# Altium PCB RTL8153B_DemoPCB.pcbdoc
Units mm, origin at the board's own origin, x right, y up, seen from the top; angles counter-clockwise.
Board outline 69.69 x 82.25 mm, 2 copper layers (Top Layer, Bottom Layer); 19 components, 44 nets, 104 pads, 53 vias.
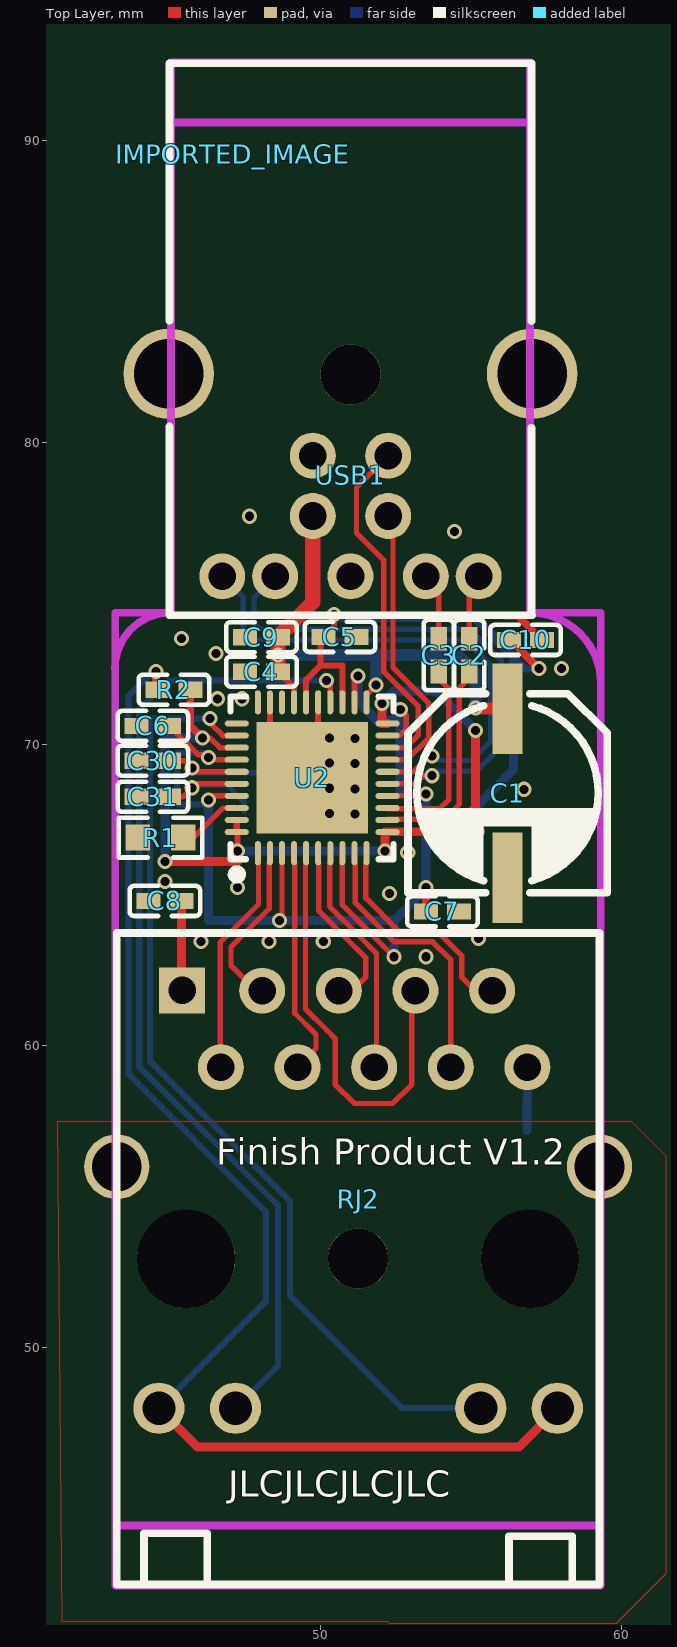
[diagram p0: Top Layer view]
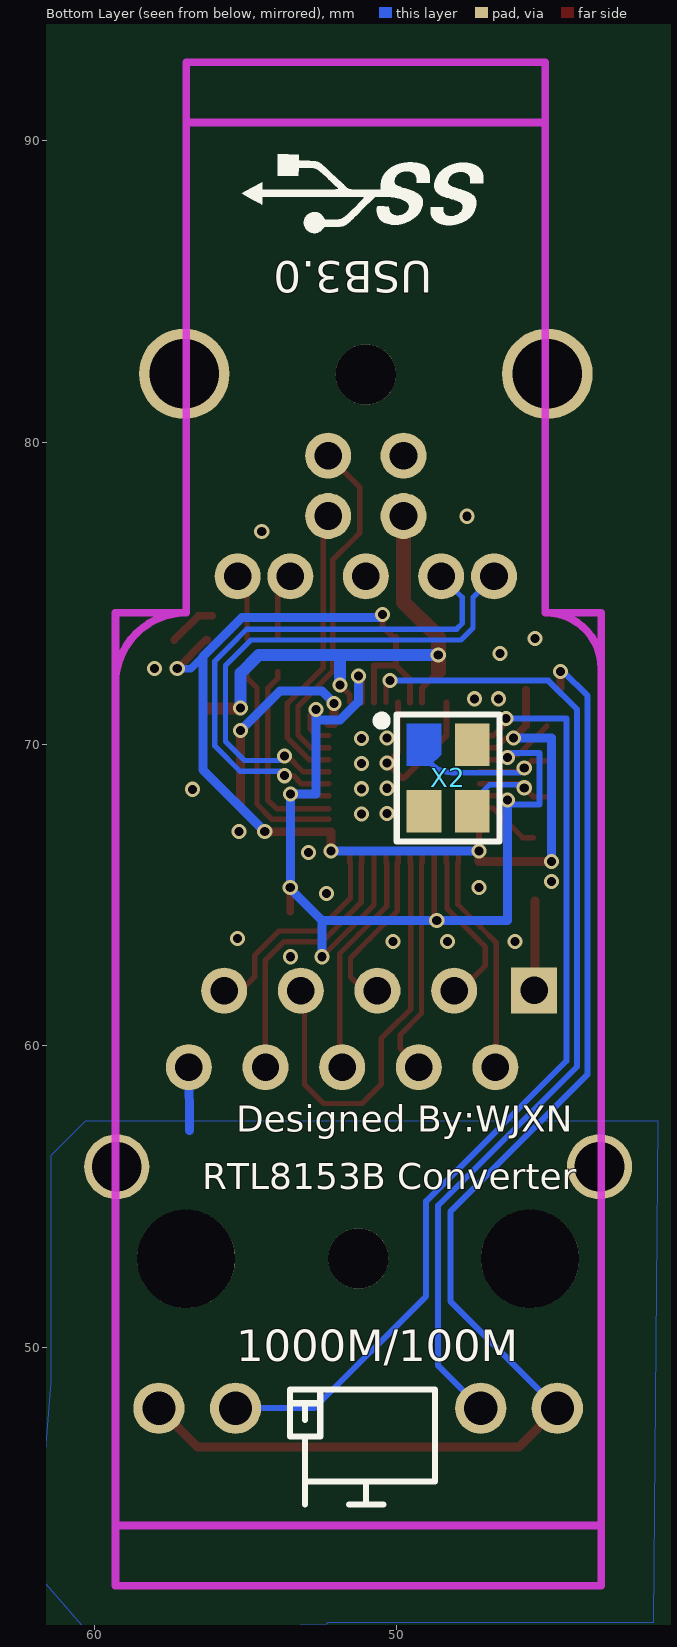
[diagram p1: Bottom Layer view, seen from below]

## Layer stack, top to bottom
Top Layer: signal copper (thickness not stored)
Dielectric: dielectric 0.32, FR-4, Dk 4.8
Bottom Layer: signal copper (thickness not stored)

## Board outline
95.09,25.4 25.4,25.4 25.4,107.651 95.09,107.651

## Components (designator, comment, footprint, x,y, rotation, side; value= is the part's Value field where it differs from the comment)
C1 "100uF" CAP-SMD_BD6.3-L6.6-W6.6-FD 56.208,68.375 r270 top
C2 "0.1uF" C0402_NEW 54.938,72.947 r270 top
C3 "0.1uF" C0402_NEW 53.922,72.947 r270 top
C4 "0.1uf" C0402_NEW 48.05,72.402 r180 top
C5 "0.1uf" C0402_NEW 50.65,73.552 r180 top
C6 "0.1uf" C0402_NEW 44.45,70.602 r0 top
C7 "10nf" C0402_NEW 54.05,64.452 r180 top
C8 "0.1UF" C0402_NEW 44.85,64.802 r0 top
C9 "10nF" C0402_NEW 48.05,73.545 r0 top
C10 "10nf" C0402_NEW 56.8,73.452 r180 top
C30 "30PF" C0402_NEW 44.45,69.452 r180 top
C31 "30PF" C0402_NEW 44.45,68.252 r0 top
IMPORTED_IMAGE "IMPORTED_IMAGE" IMPORTED_IMAGE 47.101,89.548 r0 top
R1 "2.49k" R0603_NEW 44.7,66.902 r180 top
R2 "470R" C0402_NEW 45.149,71.801 r0 top
RJ2 "HR911130A" RJ45-TH_HR911130A 51.255,54.913 r180 top
U2 "RTL8153B-VB-CG" QFN-40_L5.0-W5.0-P0.40-BL-EP3.7 49.731,68.883 r0 top
USB1 "U3B22D-09BM4YN22HF" USB3.0-B-TH_U235-091N-4BLRC16-2-5 51.001,78.916 r180 top
X2 "25MHz" OSC-SMD_4P-L3.2-W2.5-BL 48.275,68.877 r90 bottom

## Footprints (in the part's own frame and the unit in brackets; to place one, negate y for a bottom-side part, rotate by r counter-clockwise, add the part's x,y. Pads: shape width x height; smd on the part's side, far side on the other; paste and mask are expansions set on the pad)
C0402_NEW [mm]
  rect 0.79x0.54 smd: 1(-0.545,0) 2(0.545,0)
  silkscreen extent -1.17,-0.5 1.17,0.5
CAP-SMD_BD6.3-L6.6-W6.6-FD [mm]
  rect 3x1 smd: 1(-2.8,0) 2(2.8,0)
  silkscreen extent -3.3,-3.3 3.3,3.3
IMPORTED_IMAGE [mm]
OSC-SMD_4P-L3.2-W2.5-BL [mm]
  round 0 smd: 1(1.1,0.8)
  rect 1.4x1.15 smd: 2(-1.1,0.8) 3(-1.1,-0.8) 4(1.1,-0.8)
  Top Layer region: 1.8,0.225 0.762,0.225 0.4,0.604 0.4,1.375 1.8,1.375
  silkscreen extent -2.1,-1.7 2.1,2.35
QFN-40_L5.0-W5.0-P0.40-BL-EP3.7 [mm]
  oval 0.2x0.8 smd: 1(-1.8,-2.499) 2(-1.4,-2.499) 3(-1,-2.499) 4(-0.6,-2.499) 5(-0.2,-2.499) 6(0.2,-2.499) 7(0.6,-2.499) 8(1,-2.499) 9(1.4,-2.499) 10(1.8,-2.499) 21(1.8,2.499) 22(1.4,2.499) 23(1,2.499) 24(0.6,2.499) 25(0.2,2.499) 26(-0.2,2.499) 27(-0.6,2.499) 28(-1,2.499) 29(-1.4,2.499) 30(-1.8,2.499)
  oval 0.8x0.2 smd: 11(2.499,-1.8) 12(2.499,-1.4) 13(2.499,-1) 14(2.499,-0.6) 15(2.499,-0.2) 16(2.499,0.2) 17(2.499,0.6) 18(2.499,1) 19(2.499,1.4) 20(2.499,1.8) 31(-2.499,1.8) 32(-2.499,1.4) 33(-2.499,1) 34(-2.499,0.6) 35(-2.499,0.2) 36(-2.499,-0.2) 37(-2.499,-0.6) 38(-2.499,-1) 39(-2.499,-1.4) 40(-2.499,-1.8)
  rect 3.7x3.7 smd: 41(0,0)
  silkscreen extent -2.7,-3.35 2.7,2.7
R0603_NEW [mm]
  rect 0.806x0.864 smd: 1(-0.753,0) 2(0.753,0)
  silkscreen extent -1.39,-0.66 1.39,0.66
RJ45-TH_HR911130A [mil]
  round 66.93 hole 43.31: 11(260,272.62) 12(160,272.62) 13(-160,272.62) 14(-260,272.62)
  rect 60x60 hole 35.83: P1(229.63,-272.62)
  round 60 hole 35.83: P2(179.1,-172.38) P3(125.2,-272.38) P4(79.1,-172.38) P5(25.2,-272.38) P6(-20.9,-172.38) P7(-74.8,-272.38) P8(-120.9,-172.38) P9(-174.8,-272.38) P10(-220.9,-172.38)
  round 85 hole 65: SHIELD0(-315,-42.48) SHIELD1(315,-42.48)
  round 127.95 hole 127.95 unplated: ""(-224.4,77.62) ""(224.4,77.62)
  silkscreen extent -315,-347 315,503
USB3.0-B-TH_U235-091N-4BLRC16-2-5 [mil]
  round 60 hole 36: 1(49.21,53.35) 2(-49.21,53.35) 3(-49.21,-25.39) 4(49.21,-25.39) 5(-167.32,132.09) 6(-98.43,132.09) 7(0,132.09) 8(98.42,132.09) 9(167.32,132.09)
  round 118.11 hole 90.55: 10(-237.01,-132.09) 10(237.01,-132.09)
  silkscreen extent -237,-537 236,183

## Free pads (board coordinates)
  round 2 hole 2 unplated: ""(51,82.252) ""(51.25,52.952)

## Via types
v1: diameter 0.5, hole 0.3, Top Layer to Bottom Layer, tented both sides, 53 vias

## Nets (pads, with @x,y where several pads share a name; then routed paths per layer and width w, separated by ;. In a path a pad name is that pad's centre, name@x,y a point inside that pad or via, vN(x,y) a via of type N, cw(c..) or ccw(c..) an arc to the next point about the centre after c; other vN are vias at no path point)
1V0: C6.2 C7.2 U2.3 U2.8 U2.14 U2.19 U2.22 U2.34 U2.37 | length 41.1
  Top Layer w0.178: C6.2 45.944,69.652 46.299,69.652 v1@46.299,69.551 ; v1(46.3,68.152) 46.431,68.283 U2.37 ; v1(46.3,69.552) 46.369,69.483 U2.34 ; v1(48.65,64.152) 48.731,64.233 U2.3 ; U2.8 50.731,64.671 v1(52.45,62.952) ; U2.14 53.5,68.283 v1(53.5,68.352) ; U2.19 52.631,70.283 52.85,70.502 52.85,70.952 v1(52.65,71.152)
  Top Layer w0.2: U2.22 51.131,72.133 v1(51.25,72.252)
  Top Layer w0.254: C7.2 v1(53.505,65.252)
  Bottom Layer w0.2: v1(46.3,68.152) 46.149,68.001 45.25,68.001 45.25,68.103 45.25,69.701 46.149,69.701 v1@46.299,69.551
  Bottom Layer w0.3: v1(46.3,68.152) 46.299,64.151 48.649,64.151 52.449,64.151 ; v1@51.25,72.251 51.25,71.403 51.849,70.803 52.649,70.803 52.649,71.151 52.649,68.352 v1(53.5,68.352) 53.5,65.202 52.449,64.151 ; v1(52.45,62.952) 52.449,64.151
3V3: C5.2 C10.2 R2.2 U2.11 U2.20 U2.23 U2.26 U2.33 U2.39 U2.40 | length 49.1
  Top Layer w0.178: v1(46.1,70.202) 46.35,70.202 46.669,69.883 U2.33
  Top Layer w0.2: U2.39 U2.40 47.25,67.065 v1(47.25,66.452) ; U2.26 49.53,72.134 50,72.601 ; C5.2 50,73.551 50,72.601 ; C5.2 50.45,73.897 v1(50.45,74.302) ; U2.23 50.732,72.601 50,72.601
  Top Layer w0.254: R2.2 45.694,70.608 v1(46.1,70.202) ; C10.2 56.3,73.452 v1(57.25,72.502)
  Top Layer w0.3: v1(44.85,66.102) 47.25,66.102 v1(47.25,66.452) ; v1(52.05,71.352) 52.05,70.683 U2.20 ; v1(52.15,66.452) 52.149,67.082 52.23,67.082 v1@54.348,67.102 ; v1(54.35,67.102) 55.15,67.902 v1(55.15,70.452)
  Bottom Layer w0.254: 56.401,72.901 56.8,72.502 v1(57.25,72.502)
  Bottom Layer w0.3: 44.849,67.603 44.849,70.201 v1@46.099,70.201 ; v1(44.85,66.102) 44.85,67.603 ; v1(47.25,66.452) v1(52.15,66.452) ; v1@50.45,74.301 50.549,74.202 55.1,74.202 56.401,72.901 56.401,69.152 v1(54.35,67.102) ; v1(52.05,71.352) 52.449,71.753 53.851,71.753 v1(55.15,70.452)
GND: C1.2 C4.2 C5.1 C6.1 C7.1 C8.1 C9.1 C10.1 C30.2 C31.1 R1.2 U2.25 U2.29 U2.41 USB1.4 USB1.7 USB1.10 X2.2 X2.4 | length 7.6
  Top Layer w0.2: U2.29 48.331,70.283 U2.41 49.812,68.883 v1(50.299,69.37) 49.931,69.738 U2.25
  Top Layer w0.254: 56.1,74.252 56.545,74.252 C10.1
  other v1: 53.5,62.952 46.05,63.452 48.3,63.452 50.1,63.452 55.25,63.552 52.3,65.052 47.25,65.252 44.85,65.452 52.9,66.402 55.2,67.102 50.299,67.703 51.149,67.686 56.75,68.502 50.299,68.536 51.149,68.519 51.149,69.352 51.149,70.185 50.299,70.203 46.599,71.502 47.4,71.502 57.999,72.502 46.55,73.002 45.4,73.502 54.449,77.052 47.649,77.552
LED0: RJ2.13 U2.32 | length 32.1
  Top Layer w0.178: v1(46.35,70.852) 46.35,70.702 46.769,70.282 U2.32
  Bottom Layer w0.2: 44.349,61.702 44.349,59.653 44.349,59.503 48.999,54.852 48.999,51.702 52.7,48.002 RJ2.13 ; 44.35,61.702 44.35,70.852 v1(46.35,70.852)
LED1: U2.30
LED2: RJ2.12 U2.24 | length 33
  Top Layer w0.178: v1(50.2,72.102) 50.331,71.971 U2.24
  Bottom Layer w0.2: 44,59.307 44,71.152 ; 44.001,59.307 48.6,54.707 48.6,49.396 RJ2.12 ; 44.001,71.151 44.948,72.101 v1@50.201,72.101
MDI0+: RJ2.P2 U2.1 | length 8.3
  Top Layer w0.178: 46.683,62.66 46.683,63.422 47.191,63.93 47.953,64.692 47.953,65.045 47.953,66.061 47.931,66.084 U2.1 ; 46.683,63.282 46.683,59.993 46.81,59.866 46.81,59.396 RJ2.P2
MDI0-: RJ2.P3 U2.2 | length 5.6
  Top Layer w0.178: RJ2.P3 47.867,61.831 47.039,62.66 47.039,63.274 47.547,63.782 48.309,64.544 48.309,65.045 48.309,66.061 48.331,66.084 U2.2
MDI1+: RJ2.P4 U2.4 | length 7.6
  Top Layer w0.178: U2.4 49.131,66.084 49.153,66.061 49.153,65.045 49.153,61.079 49.858,60.374 49.858,59.903 RJ2.P4
MDI1-: RJ2.P7 U2.5 | length 14.4
  Top Layer w0.178: U2.5 49.531,66.084 49.509,66.061 49.509,65.045 49.509,61.226 50.214,60.521 ; 50.213,60.521 50.493,60.242 50.493,58.723 51.128,58.088 52.398,58.088 53.033,58.723 53.033,61.832 RJ2.P7
MDI2+: RJ2.P5 U2.6 | length 5.8
  Top Layer w0.178: U2.6 49.931,66.084 49.953,66.061 49.953,65.045 49.953,64.47 50.874,63.549 51.509,62.914 51.509,62.279 51.061,61.831 RJ2.P5
MDI2-: RJ2.P6 U2.7 | length 7.8
  Top Layer w0.178: U2.7 50.331,66.084 50.309,66.061 50.309,65.045 50.309,64.617 51.23,63.696 51.865,63.061 51.865,62.279 51.865,59.37 RJ2.P6
MDI3+: RJ2.P8 U2.9 | length 9.8
  Top Layer w0.178: U2.9 51.131,66.084 51.153,66.061 51.153,65.045 51.153,64.745 52.451,63.447 53.414,63.447 53.724,63.447 54.328,62.843 54.328,62.279 ; 54.328,62.688 54.328,59.758 RJ2.P8@54.842,59.244
MDI3-: RJ2.P9 U2.10 | length 7.4
  Top Layer w0.178: U2.10 51.531,66.084 51.509,66.061 51.509,65.045 51.509,64.893 52.599,63.803 53.414,63.803 53.871,63.803 54.684,62.991 54.684,62.279 55.131,61.831 RJ2.P9
RJ2_14: R2.1 RJ2.11 RJ2.14 | length 43.1
  Top Layer w0.254: v1(44.55,72.402) 44.55,71.857 R2.1@44.605,71.802
  Top Layer w0.3: RJ2.11 45.936,46.701 56.574,46.701 RJ2.14
  Bottom Layer w0.2: v1@44.549,72.401 44.45,72.401 43.65,71.601 43.65,59.053 48.199,54.504 48.199,51.537 RJ2.11
RJ2_P1: C8.2 RJ2.P1 | length 3
  Top Layer w0.3: C8.2 45.395,61.865 RJ2.P1
S$30035: 
S$30592: 
S$30594: 
S$30596: 
S$30598: 
S$30994: 
S$30996: 
S$31000: 
S$31002: 
S$31693: 
S$31696: 
S$31698: 
S$31700: 
S$31702: 
S$31704: 
SHIELD: RJ2.P10 RJ2.SHIELD0 RJ2.SHIELD1 | length 2.1
  Bottom Layer w0.3: 56.85,57.201 RJ2.P10
SSRX_N: U2.15 USB1.8 | length 17.7
  Top Layer w0.178: U2.15@52.23,68.683 53.131,68.683 53.4,68.952 v1(53.7,68.952)
  Bottom Layer w0.178: USB1.8 47.804,74.864 47.804,73.995 47.991,73.808 50.35,73.808 54.947,73.808 55.556,73.199 56.006,72.749 56.006,71.552 56.006,69.942 55.163,69.099 54.863,69.099 53.847,69.099 v1(53.7,68.952)
SSRX_P: U2.16 USB1.9 | length 17.2
  Top Layer w0.178: U2.16 53.081,69.083 53.6,69.602 v1(53.7,69.602)
  Bottom Layer w0.178: USB1.9 47.448,74.864 47.448,73.848 47.844,73.452 50.35,73.452 54.8,73.452 55.2,73.052 55.65,72.602 55.65,71.552 55.65,70.089 55.015,69.455 54.863,69.455 53.847,69.455 v1(53.7,69.602)
SSTX_N: C2.2 U2.12 | length 7.1
  Top Layer w0.178: U2.12@52.23,67.504 54.107,67.504 54.608,68.007 54.608,71.86 54.938,72.19 C2.2@54.938,72.401
SSTX_P: C3.2 U2.13 | length 6.5
  Top Layer w0.178: U2.13@52.23,67.862 53.96,67.862 54.252,68.154 54.252,71.85 53.922,72.18 C3.2@53.922,72.401
U2_38: R1.1 U2.38 | length 2.2
  Top Layer w0.178: R1.1 45.799,66.902 46.782,67.882 U2.38@47.231,67.882
U2D+: U2.18 USB1.3 | length 11.7
  Top Layer w0.178: U2.18 52.83,69.884 53.249,70.303 53.249,71.253 52.101,72.401 52.101,76.102 51.3,76.902 51.199,77.003 51.199,78.509 USB1.3
U2D-: U2.17 USB1.2 | length 9.6
  Top Layer w0.178: U2.17 52.88,69.482 53.599,70.201 53.599,71.202 53.599,71.352 52.408,72.546 52.408,76.109 52.408,77.404 USB1.2
USB1_5: C2.1 USB1.5 | length 2.2
  Top Layer w0.178: C2.1 54.938,75.248 USB1.5
USB1_6: C3.1 USB1.6 | length 2.2
  Top Layer w0.178: USB1.6 53.922,75.14 C3.1
VBUS: C1.1 C4.1 C9.2 U2.21 U2.27 USB1.1 | length 17.6
  Top Layer w0.178: U2.21 51.531,71.633 v1(51.85,71.952)
  Top Layer w0.2: C4.1 49.131,71.866 U2.27
  Top Layer w0.4: v1(55.15,71.202) 55.177,71.175 C1.1
  Top Layer w0.5: C4.1 C9.2 49.751,74.701 USB1.1
  Bottom Layer w0.4: v1(48.599,72.952) 51.849,72.952 ; v1@51.849,71.951 51.849,72.952 ; v1(55.15,71.202) 55.149,72.353 54.549,72.952 51.849,72.952
XTALI: C30.1 U2.35 X2.1 | length 6.3
  Top Layer w0.178: C30.1 45.5,69.452 v1(45.75,69.202) 45.869,69.083 U2.35
  Bottom Layer w0.178: v1(45.75,69.202) 45.9,69.052 46.55,69.052 48.15,69.052 ccw(c48.15,69.977) X2.1
XTALO: C31.2 U2.36 X2.3 | length 4.7
  Top Layer w0.178: C31.2 45.45,68.252 v1(45.75,68.552) 45.881,68.683 U2.36@47.231,68.683
  Bottom Layer w0.178: v1(45.75,68.552) 45.85,68.652 46.9,68.652 47.475,68.077 X2.3
pads on no net: RJ2. U2.28 U2.31

## Polygon pours and split planes (outlines as drawn)
SHIELD on Bottom Layer (solid): 41.3,57.502 60.3,57.502 61.45,56.352 61.45,48.852 61.9,43.302 61.75,42.302 60.2,40.552 52.3,40.852 52.25,40.902 41.45,40.902
GND on Bottom Layer (solid): 39.15,94.101 62.301,94.101 64.001,92.401 64.001,41.2 60.901,38.1 38.801,38.1
SHIELD on Top Layer (solid): 41.3,57.502 60.3,57.502 61.45,56.352 61.45,48.852 61.45,43.302 61.45,42.502 59.8,40.852 52.3,40.852 52.25,40.902 41.45,40.902
GND on Top Layer (solid): 38.45,94.951 61.6,94.951 63.3,93.251 63.3,42.051 60.2,38.951 38.1,38.951

## Keep-outs
Keep-Out Layer:
  lines w0.254 net S$30594: 43.193,72.502 cw(c45.042,72.509) 45.05,74.358
  lines w0.254 net S$30596: 56.95,74.352 cw(c56.955,72.007) 59.299,72.002

## Silkscreen, mask and mechanical layers (free items; w line width, h text height)
Top Overlay:
  text "Finish Product V1.2" at 46.55,55.752 h1.5
  text "JLCJLCJLCJLC" at 46.95,44.752 h1.5
Bottom Overlay:
  lines w0.2 net S$31693: 51.761,48.601 48.711,48.601 48.711,45.553 53.011,45.553 53.011,47.051 ; 53.011,47.051 52.511,47.051 52.511,48.601 53.511,48.601 53.511,47.051 53.011,47.051
  lines w0.2 net S$31696: 52.512,48.152 53.412,48.152
  lines w0.2 net S$31698: 51.762,48.602 52.512,48.602
  lines w0.2 net S$31700: 50.412,44.802 51.562,44.802 51,44.802 51,45.552
  lines w0.2 net S$31702: 53.012,44.802 53.012,45.552
  lines w0.2 net S$31704: 53.012,47.602 53.012,48.052
  text "USB3.0" at 48.8,86.352 h1.8 r180
  text "Designed By:WJXN" at 55.3,56.852 h1.5
  text "RTL8153B Converter" at 56.42,54.952 h1.5
  text "1000M/100M" at 55.3,49.202 h1.8
Document:
  text "此处不需要V CUT，直接去掉" at 67.15,90.002 h2.03
  text "半孔按无铜孔制作" at 67.3,81.202 h2.03
  text "差分：0.178/0.127" at 67.13,62.66 h2.03 r359
  text "孔：0.5/0.3" at 69.33,59.96 h2.03 r359
  text "半孔按无铜孔制作" at 66.95,55.302 h2.03
  text "此处不需要V CUT，直接去掉" at 66.7,43.001 h2.03